# Altium PCB EMS_TC_PCB_V2.PcbDoc (part 1 of 2)
Units mil, origin at the board's own origin, x right, y up, seen from the top; angles counter-clockwise.
Board outline 4000 x 10000 mil, 4 copper layers (Top Layer, GND_1, Signal_2, GND_2), stack 53.912 mil thick; 64 components, 62 nets, 322 pads, 104 vias.
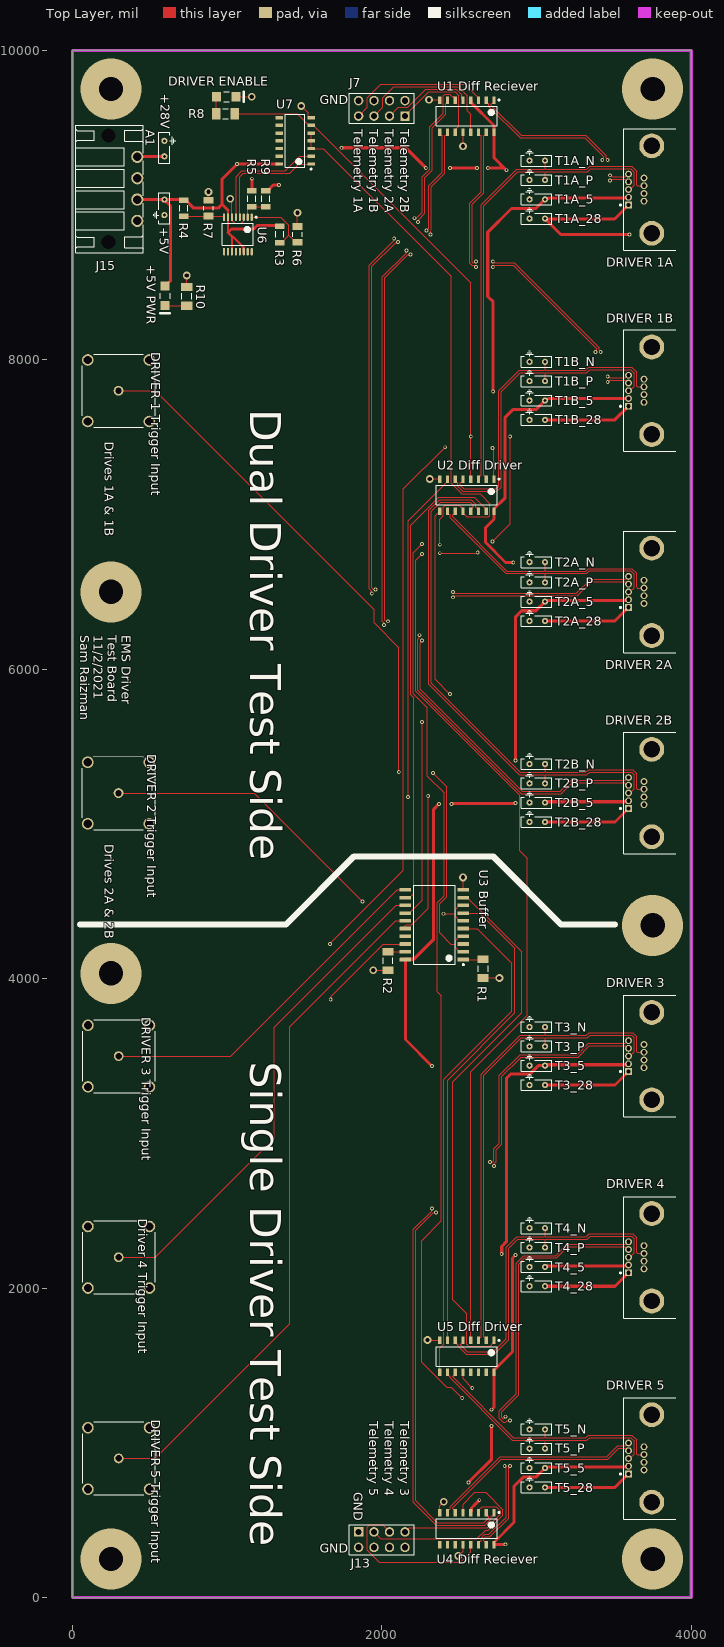
[diagram p0: Top Layer view]
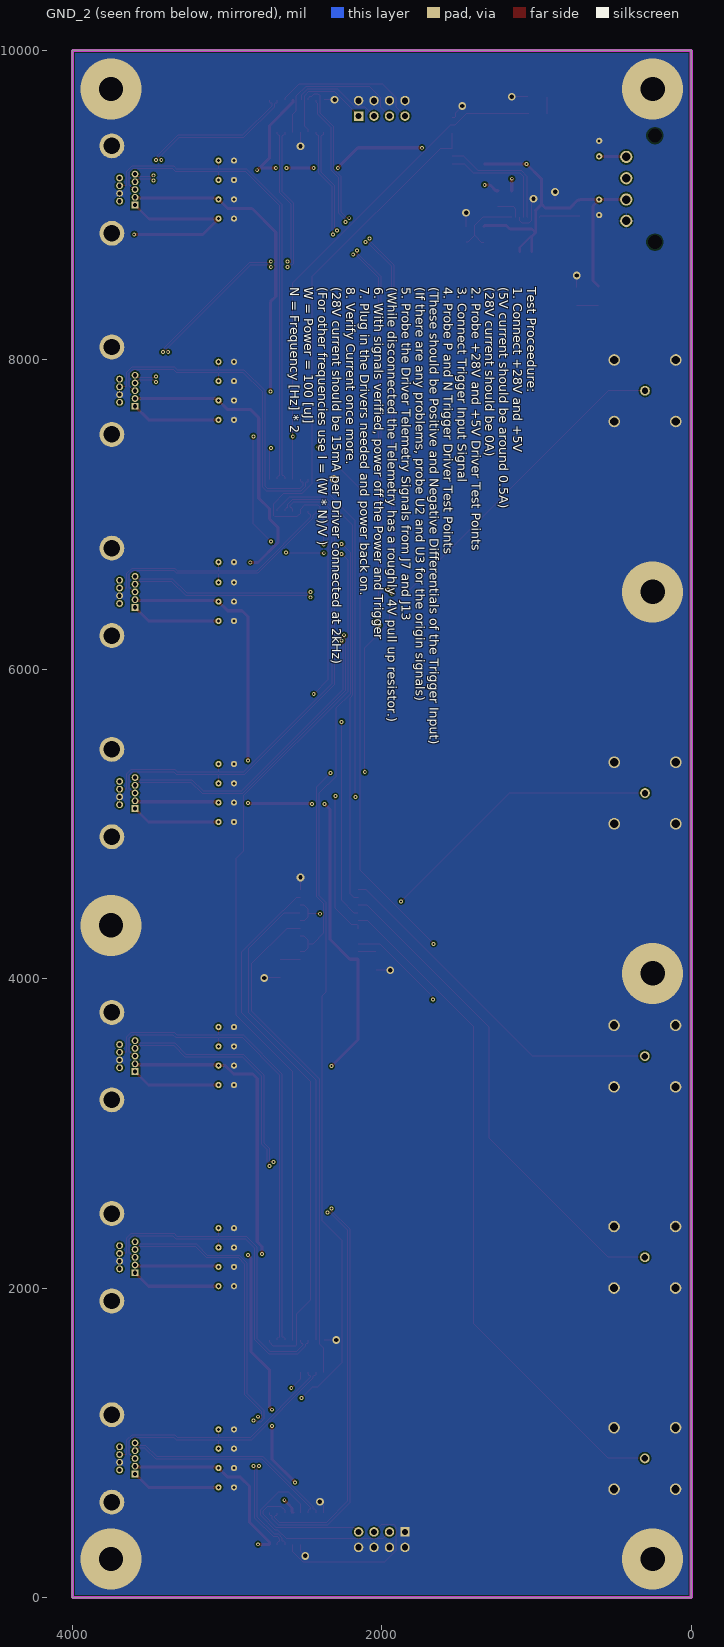
[diagram p1: GND_2 view, seen from below]
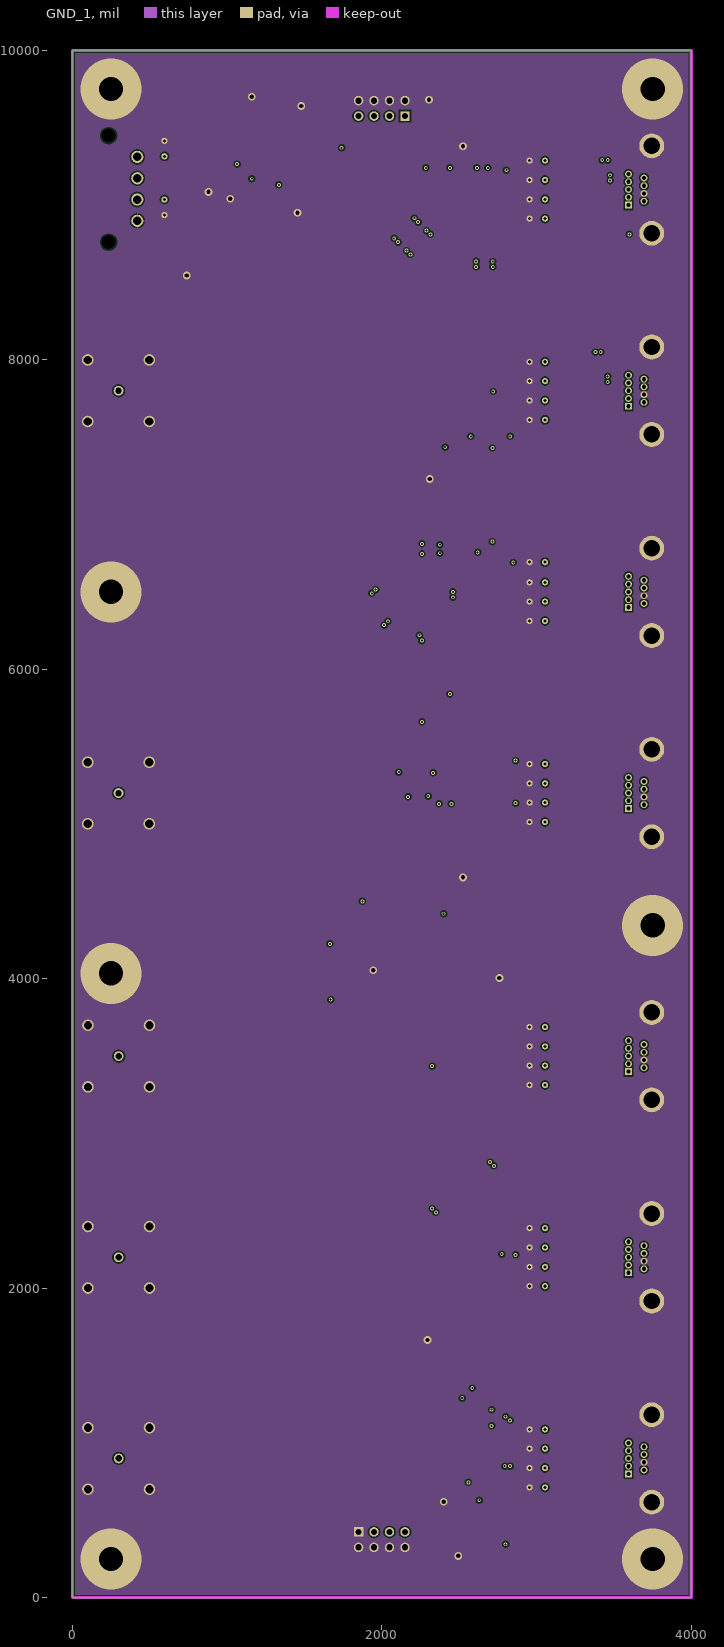
[diagram p2: GND_1]
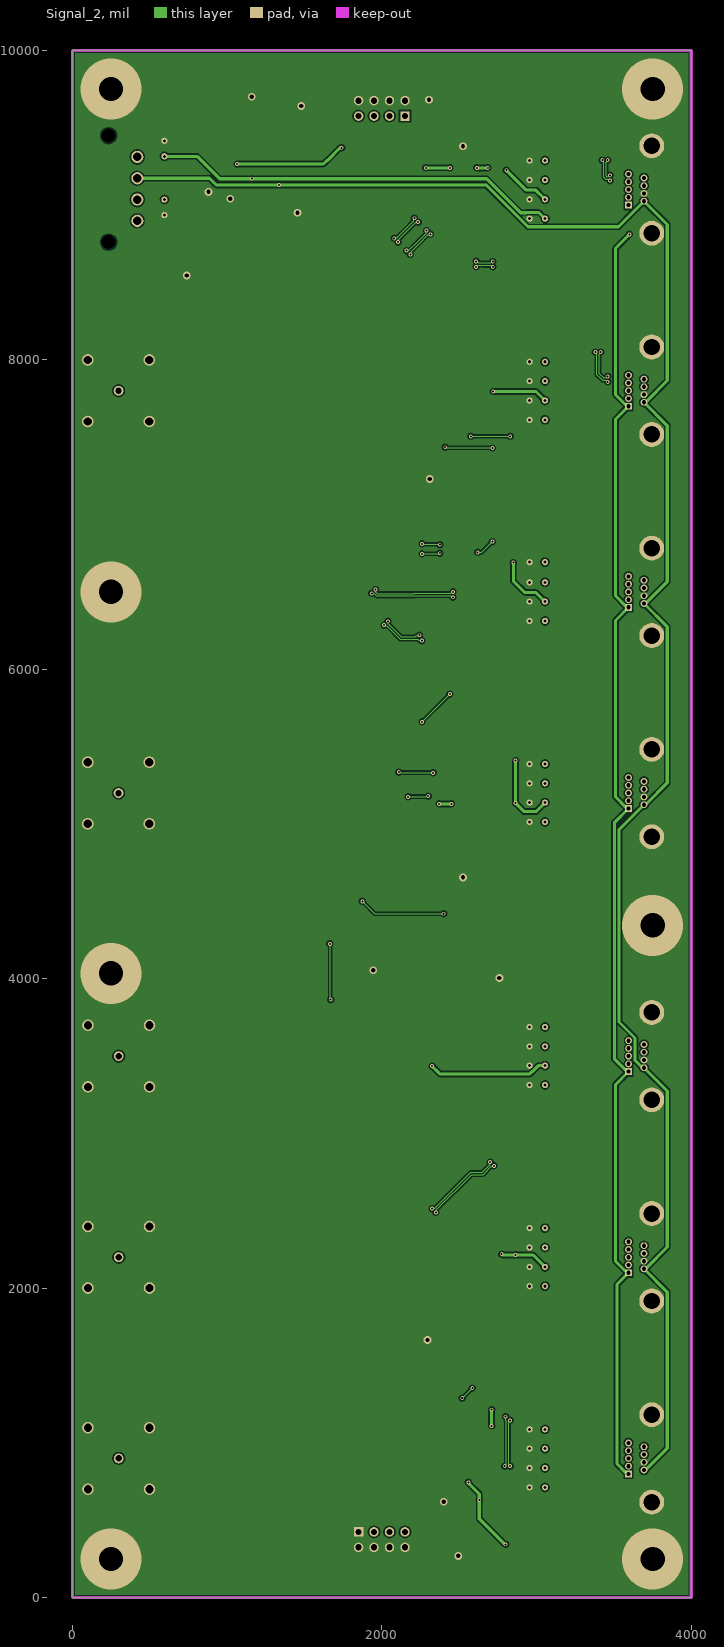
[diagram p3: Signal_2]

## Layer stack, top to bottom
Top Solder: solder mask 1, SM-001, Dk 4
Top Layer: signal copper 1.378
Dielectric 1: prepreg 5.1, PP-017, Dk 4.3
Dielectric 2: prepreg 5.1, PP-017, Dk 4.3
GND_1: signal copper 1.378
Dielectric 3: core 28, Core-039, Dk 4.8
Signal_2: signal copper 1.378
Dielectric 4: prepreg 5.1, PP-017, Dk 4.3
Dielectric 5: prepreg 5.1, PP-017, Dk 4.3
GND_2: signal copper 1.378
Bottom Solder: solder mask 1, SM-001, Dk 4

## Board outline
0,0 4000,0 4000,10000 0,10000

## Design rules (kind name [scope] priority, off if disabled: settings)
Clearance [All] p1: gap=10 ignorepadtopadclearanceinfootprint=FALSE except(0: Arc-Hole Track-Hole SMDPad-Hole THPad-Hole Via-Hole Fill-Hole Poly-Hole Region-Hole Text-Hole)
DiffPairsRouting "Schematic Differential Pairs Routing_6" [InNet('TRIG_5_P')] p1: maxlimit=10 minlimit=10 mostfreqgap=10 toplayer_minwidth=6 toplayer_maxwidth=15 toplayer_prefwidth=6 midlayer1_minwidth=6 midlayer1_maxwidth=15 midlayer1_prefwidth=6 midlayer2_minwidth=6 midlayer2_maxwidth=15 midlayer2_prefwidth=6 bottomlayer_minwidth=6 bottomlayer_maxwidth=15 bottomlayer_prefwidth=6 maxuncoupledlength=500
DiffPairsRouting "Schematic Differential Pairs Routing_5" [InNet('TRIG_1_B_P')] p2: maxlimit=10 minlimit=10 mostfreqgap=10 toplayer_minwidth=6 toplayer_maxwidth=15 toplayer_prefwidth=6 midlayer1_minwidth=6 midlayer1_maxwidth=15 midlayer1_prefwidth=6 midlayer2_minwidth=6 midlayer2_maxwidth=15 midlayer2_prefwidth=6 bottomlayer_minwidth=6 bottomlayer_maxwidth=15 bottomlayer_prefwidth=6 maxuncoupledlength=500
DiffPairsRouting "Schematic Differential Pairs Routing_4" [InNet('TRIG_4_P')] p3: maxlimit=10 minlimit=10 mostfreqgap=10 toplayer_minwidth=6 toplayer_maxwidth=15 toplayer_prefwidth=6 midlayer1_minwidth=6 midlayer1_maxwidth=15 midlayer1_prefwidth=6 midlayer2_minwidth=6 midlayer2_maxwidth=15 midlayer2_prefwidth=6 bottomlayer_minwidth=6 bottomlayer_maxwidth=15 bottomlayer_prefwidth=6 maxuncoupledlength=500
DiffPairsRouting "Schematic Differential Pairs Routing_3" [InNet('TELE_3_P')] p4: maxlimit=10 minlimit=6 mostfreqgap=10 toplayer_mingap=10 toplayer_minwidth=6 toplayer_maxwidth=15 toplayer_prefwidth=6 midlayer1_minwidth=6 midlayer1_maxwidth=15 midlayer1_prefwidth=6 midlayer2_minwidth=6 midlayer2_maxwidth=15 midlayer2_prefwidth=6 bottomlayer_mingap=10 bottomlayer_minwidth=6 bottomlayer_maxwidth=15 bottomlayer_prefwidth=6 maxuncoupledlength=500
DiffPairsRouting "Schematic Differential Pairs Routing_2" [InNet('TRIG_1_A_N')] p5: maxlimit=10 minlimit=10 mostfreqgap=10 toplayer_minwidth=6 toplayer_maxwidth=15 toplayer_prefwidth=6 midlayer1_minwidth=6 midlayer1_maxwidth=15 midlayer1_prefwidth=6 midlayer2_minwidth=6 midlayer2_maxwidth=15 midlayer2_prefwidth=6 bottomlayer_minwidth=6 bottomlayer_maxwidth=15 bottomlayer_prefwidth=6 maxuncoupledlength=500
DiffPairsRouting "Schematic Differential Pairs Routing_1" [InNet('TRIG_3_P')] p6: maxlimit=10 minlimit=10 mostfreqgap=10 toplayer_minwidth=6 toplayer_maxwidth=15 toplayer_prefwidth=6 midlayer1_minwidth=6 midlayer1_maxwidth=15 midlayer1_prefwidth=6 midlayer2_minwidth=6 midlayer2_maxwidth=15 midlayer2_prefwidth=6 bottomlayer_minwidth=6 bottomlayer_maxwidth=15 bottomlayer_prefwidth=6 maxuncoupledlength=500
DiffPairsRouting "Schematic Differential Pairs Routing" [InNet('TRIG_2_A_P')] p7: maxlimit=10 minlimit=6 mostfreqgap=6 toplayer_minwidth=6 toplayer_maxwidth=15 toplayer_prefwidth=6 midlayer1_minwidth=6 midlayer1_maxwidth=15 midlayer1_prefwidth=6 midlayer2_minwidth=6 midlayer2_maxwidth=15 midlayer2_prefwidth=6 bottomlayer_minwidth=6 bottomlayer_maxwidth=15 bottomlayer_prefwidth=6 maxuncoupledlength=500
DiffPairsRouting [All] p8: maxlimit=10 minlimit=10 mostfreqgap=10 toplayer_minwidth=6 toplayer_maxwidth=15 toplayer_prefwidth=6 midlayer1_minwidth=6 midlayer1_maxwidth=15 midlayer1_prefwidth=6 midlayer2_minwidth=6 midlayer2_maxwidth=15 midlayer2_prefwidth=6 bottomlayer_minwidth=6 bottomlayer_maxwidth=15 bottomlayer_prefwidth=6 maxuncoupledlength=500
PlaneConnect [All] p1: planeconnectstyle=Direct reliefexpansion=20 reliefentries=4 reliefconductorwidth=10 reliefairgap=10
PolygonConnect [All] p1: connectstyle=Direct reliefconductorwidth=10 reliefentries=4 polygonreliefangle="90 Angle" airgapwidth=10
RoutingVias [All] p1: holewidth=13 width=25 viastyle="Through Hole" minholewidth=13 minwidth=25 maxholewidth=60 maxwidth=80
SolderMaskExpansion [All] p1: expansion=4 istentingtop=FALSE
UnRoutedNet [All] p1: checkbadconnections=TRUE
Width [All] p1: maxlimit=25 minlimit=6 preferedwidth=6 minimp=50.000000 maximp=50.000000 favimp=50.000000
27 further rules are at their usual default settings.

## Classes and differential pairs
differential pair class TRIG_5: TRIG_5
differential pair class TRIG_4: TRIG_4
differential pair class TRIG_3: TRIG_3
differential pair class TRIG_2_B: TRIG_2_B
differential pair class TRIG_2_A: TRIG_2_A
differential pair class TRIG_1_B: TRIG_1_B
differential pair class TRIG_1_A: TRIG_1_A
differential pair class TELE_5: TELE_5
differential pair class TELE_4: TELE_4
differential pair class TELE_3: TELE_3
differential pair class TELE_2_B: TELE_2_B
differential pair class TELE_2_A: TELE_2_A
differential pair class TELE_1_B: TELE_1_B
differential pair class TELE_1_A: TELE_1_A
component class EMS_TC_PWR: +5V "+5V PWR" +28V "DRIVER ENABLE" J15 R3 R4 R5 R6 R7 R8 R9 R10 T1A_5 T1A_28 T1A_N T1A_P T1B_5 T1B_28 T1B_N T1B_P T2A_5 T2A_28 T2A_N T2A_P T2B_5 T2B_28 T2B_N T2B_P T3_5 T3_28 T3_N T3_P T4_5 T4_28 T4_N T4_P T5_5 T5_N T5_P U6 U7
component class EMS_TC_IO: "DRIVER 1 Trigger Input" "DRIVER 1A" "DRIVER 1B" "DRIVER 2 Trigger Input" "DRIVER 2A" "DRIVER 2B" "DRIVER 3" "DRIVER 3 Trigger Input" "DRIVER 4" "Driver 4 Trigger Input" "DRIVER 5" "DRIVER 5 Trigger Input" J7 J13 R1 R2 "U1 Diff Reciever" "U2 Diff Driver" "U3 Buffer" "U4 Diff Reciever" "U5 Diff Driver"
differential pair TRIG_5: +TRIG_5_P -TRIG_5_N
differential pair TRIG_4: +TRIG_4_P -TRIG_4_N
differential pair TRIG_3: +TRIG_3_P -TRIG_3_N
differential pair TRIG_2_B: +TRIG_2_B_P -TRIG_2_B_N
differential pair TRIG_2_A: +TRIG_2_A_P -TRIG_2_A_N
differential pair TRIG_1_B: +TRIG_1_B_P -TRIG_1_B_N
differential pair TRIG_1_A: +TRIG_1_A_P -TRIG_1_A_N
differential pair TELE_5: +TELE_5_P -TELE_5_N
differential pair TELE_4: +TELE_4_P -TELE_4_N
differential pair TELE_3: +TELE_3_P -TELE_3_N
differential pair TELE_2_B: +TELE_2_B_P -TELE_2_B_N
differential pair TELE_2_A: +TELE_2_A_P -TELE_2_A_N
differential pair TELE_1_B: +TELE_1_B_P -TELE_1_B_N
differential pair TELE_1_A: +TELE_1_A_P -TELE_1_A_N

## Components (designator, comment, footprint, x,y, rotation, side; value= is the part's Value field where it differs from the comment)
+5V "+5V_IN Probe" TDR_Probe 595,9035 r270 top (schematic designator TP2)
"+5V PWR" "SML-LX1206GC-TR" LUMX-SML-LX1206GC-TR_V 600,8412.99 r270 top (schematic designator DS2)
+28V "+28V_IN Probe" TDR_Probe 595,9315 r90 top (schematic designator TP1)
"DRIVER 1 Trigger Input" "TRIG_1_IN" ROS-51K204-400A5_V 298.82,7800 r90 top (schematic designator J5)
"DRIVER 1A" "DRIVER_1A" FP-381-009-112L565-MFG 3900,9100 r90 top (schematic designator J1)
"DRIVER 1B" "DRIVER_1B" FP-381-009-112L565-MFG 3900,7800 r90 top (schematic designator J2)
"DRIVER 2 Trigger Input" "TRIG_2_IN" ROS-51K204-400A5_V 298.82,5200 r90 top (schematic designator J6)
"DRIVER 2A" "DRIVER_2A" FP-381-009-112L565-MFG 3900,6500 r90 top (schematic designator J3)
"DRIVER 2B" "DRIVER_2B" FP-381-009-112L565-MFG 3900,5200 r90 top (schematic designator J4)
"DRIVER 3" "DRIVER_3" FP-381-009-112L565-MFG 3900,3500 r90 top (schematic designator J9)
"DRIVER 3 Trigger Input" "TRIG_3_IN" ROS-51K204-400A5_V 300,3500 r90 top (schematic designator J8)
"DRIVER 4" "DRIVER_4" FP-381-009-112L565-MFG 3900,2200 r90 top (schematic designator J10)
"Driver 4 Trigger Input" "TRIG_4_IN" ROS-51K204-400A5_V 300,2200 r90 top (schematic designator J12)
"DRIVER 5" "DRIVER_5" FP-381-009-112L565-MFG 3900,900 r90 top (schematic designator J11)
"DRIVER 5 Trigger Input" "TRIG_5_IN" ROS-51K204-400A5_V 300,900 r90 top (schematic designator J14)
"DRIVER ENABLE" "SML-LX1206GC-TR" LUMX-SML-LX1206GC-TR_V 995,9700 r0 top (schematic designator DS1)
J7 "SSW-104-02-G-D" SMTC-SSW-104-02-X-D 2150,9575 r180 top
J13 "SSW-104-02-G-D" SMTC-SSW-104-02-X-D 1850,425 r0 top
J15 "1607060000" SL_3_50_90F_04 239.72,9104.49 r270 top
R1 "10k" RESC3116X65X40ML10T20 2655,4065 r270 top
R2 "10k" RESC3116X65X40ML10T20 2040,4115 r270 top
R3 "8.2k" RESC3216X70X50LL05T20 1340,8810 r90 top
R4 "8.2k" RESC3216X70X50LL05T20 720,8980 r90 top
R5 "8.2k" RESC3216X70X50LL05T20 1160,9040 r90 top
R6 "820k" RESC3216X70X50LL20T25 1455,8810 r270 top
R7 "820k" RESC3216X70X50LL20T25 880,8980 r270 top
R8 "330" FP-CRCW1206-e3-IPC_A 990,9590 r180 top
R9 "1.8k" RESC3216X70X50LL05T20 1250,9040 r270 top
R10 "330" FP-CRCW1206-e3-IPC_A 740,8410 r270 top
T1A_5 "+5V" TDR_Probe 3055,9037 r180 top (schematic designator TP24)
T1A_28 "+28V" TDR_Probe 3055,8912 r180 top (schematic designator TP17)
T1A_N "TRIG_1A_N" TDR_Probe 3055,9287 r180 top (schematic designator TP10)
T1A_P "TRIG_1A_P" TDR_Probe 3055,9162 r180 top (schematic designator TP3)
T1B_5 "+5V" TDR_Probe 3055,7737 r180 top (schematic designator TP25)
T1B_28 "+28V" TDR_Probe 3055,7612 r180 top (schematic designator TP18)
T1B_N "TRIG_1B_N" TDR_Probe 3055,7987 r180 top (schematic designator TP11)
T1B_P "TRIG_1B_P" TDR_Probe 3055,7862 r180 top (schematic designator TP4)
T2A_5 "+5V" TDR_Probe 3055,6437 r180 top (schematic designator TP26)
T2A_28 "+28V" TDR_Probe 3055,6312 r180 top (schematic designator TP19)
T2A_N "TRIG_2A_N" TDR_Probe 3055,6692 r180 top (schematic designator TP12)
T2A_P "TRIG_2A_P" TDR_Probe 3055,6562 r180 top (schematic designator TP5)
T2B_5 "+5V" TDR_Probe 3055,5138 r180 top (schematic designator TP27)
T2B_28 "+28V" TDR_Probe 3055,5013 r180 top (schematic designator TP20)
T2B_N "TRIG_2B_N" TDR_Probe 3055,5388 r180 top (schematic designator TP13)
T2B_P "TRIG_2B_P" TDR_Probe 3055,5263 r180 top (schematic designator TP6)
T3_5 "+5V" TDR_Probe 3055,3438 r180 top (schematic designator TP28)
T3_28 "+28V" TDR_Probe 3055,3313 r180 top (schematic designator TP21)
T3_N "TRIG_3_N" TDR_Probe 3055,3688 r180 top (schematic designator TP14)
T3_P "TRIG_3_P" TDR_Probe 3055,3563 r180 top (schematic designator TP7)
T4_5 "+5V" TDR_Probe 3055,2138 r180 top (schematic designator TP29)
T4_28 "+28V" TDR_Probe 3055,2013 r180 top (schematic designator TP22)
T4_N "TRIG_4_N" TDR_Probe 3055,2388 r180 top (schematic designator TP15)
T4_P "TRIG_4_P" TDR_Probe 3055,2263 r180 top (schematic designator TP8)
T5_5 "+5V" TDR_Probe 3055,838 r180 top (schematic designator TP30)
T5_28 "+28V" TDR_Probe 3055,713 r180 top (schematic designator TP23)
T5_N "TRIG_5_N" TDR_Probe 3055,1088 r180 top (schematic designator TP16)
T5_P "TRIG_5_P" TDR_Probe 3055,963 r180 top (schematic designator TP9)
"U1 Diff Reciever" "DS26C32ATM" D0016A_L 2550,9575 r270 top (schematic designator U1)
"U2 Diff Driver" "DS26C31TM" D0016A_L 2550,7125 r270 top (schematic designator U2)
"U3 Buffer" "SN74ABT240ADW" DW0020A_N 2340,4349.23 r180 top (schematic designator U3)
"U4 Diff Reciever" "DS26C32ATM" D0016A_L 2550,446.65 r270 top (schematic designator U4)
"U5 Diff Driver" "DS26C31TM" D0016A_L 2550,1560 r270 top (schematic designator U5)
U6 "AD8564" ADI-RU-16_L 1070,8810 r270 top
U7 "SN74AHCT132D" D0014A_L 1440,9415 r180 top

## Footprints (in the part's own frame and the unit in brackets; to place one, negate y for a bottom-side part, rotate by r counter-clockwise, add the part's x,y. Pads: shape width x height; smd on the part's side, far side on the other; paste and mask are expansions set on the pad)
ADI-RU-16_L [mm] "SOP, 16-Leads, Body 5x4.4mm, Pitch 0.65mm, IPC High Density"
  oval 1.25x0.35 smd: 1(-2.825,2.275) 2(-2.825,1.625) 3(-2.825,0.975) 4(-2.825,0.325) 5(-2.825,-0.325) 6(-2.825,-0.975) 7(-2.825,-1.625) 8(-2.825,-2.275) 9(2.825,-2.275) 10(2.825,-1.625) 11(2.825,-0.975) 12(2.825,-0.325) 13(2.825,0.325) 14(2.825,0.975) 15(2.825,1.625) 16(2.825,2.275)
  silkscreen extent -2.95,-2.55 1.8,3.13, body extent -2.25,-2.55 2.25,2.55, height 1.2
D0014A_L [mm] "SOIC, 14-Leads, Body 8.75x4mm, Pitch 1.27mm, IPC High Density"
  rrect18% 1.25x0.55 smd: 1(-2.625,3.81) 2(-2.625,2.54) 3(-2.625,1.27) 4(-2.625,0) 5(-2.625,-1.27) 6(-2.625,-2.54) 7(-2.625,-3.81) 8(2.625,-3.81) 9(2.625,-2.54) 10(2.625,-1.27) 11(2.625,0) 12(2.625,1.27) 13(2.625,2.54) 14(2.625,3.81)
  silkscreen extent -2.75,-4.38 1.6,4.76, body extent -3.02,-4.32 3.02,4.32, height 1.59
D0016A_L [mm] "SOIC, 16-Leads, Body 10x4mm, Pitch 1.27mm, IPC High Density"
  rrect18% 1.25x0.55 smd: 1(-2.625,4.445) 2(-2.625,3.175) 3(-2.625,1.905) 4(-2.625,0.635) 5(-2.625,-0.635) 6(-2.625,-1.905) 7(-2.625,-3.175) 8(-2.625,-4.445) 9(2.625,-4.445) 10(2.625,-3.175) 11(2.625,-1.905) 12(2.625,-0.635) 13(2.625,0.635) 14(2.625,1.905) 15(2.625,3.175) 16(2.625,4.445)
  silkscreen extent -2.75,-5 1.6,5.4, body extent -3,-4.95 3,4.95, height 1.59
DW0020A_N [mm] "SOIC, 20-Leads, Body 13x7.6mm, Pitch 1.27mm, IPC Medium Density"
  rrect17% 1.9x0.6 smd: 1(-4.75,5.715) 2(-4.75,4.445) 3(-4.75,3.175) 4(-4.75,1.905) 5(-4.75,0.635) 6(-4.75,-0.635) 7(-4.75,-1.905) 8(-4.75,-3.175) 9(-4.75,-4.445) 10(-4.75,-5.715) 11(4.75,-5.715) 12(4.75,-4.445) 13(4.75,-3.175) 14(4.75,-1.905) 15(4.75,-0.635) 16(4.75,0.635) 17(4.75,1.905) 18(4.75,3.175) 19(4.75,4.445) 20(4.75,5.715)
  silkscreen extent -4.88,-6.5 3.4,6.69, body extent -5.16,-6.4 5.16,6.4, height 2.52
FP-381-009-112L565-MFG [mm]
  rect 1.12x1.12 hole 0.7 paste-1000 mask+0: 1(-2.54,7.76)
  round 1.12 hole 0.7 paste-1000 mask+0: 2(-1.27,7.76) 3(0,7.76) 4(1.27,7.76) 5(2.54,7.76) 6(-1.905,5.22) 7(-0.635,5.22) 8(0.635,5.22) 9(1.905,5.22)
  round 4.09 hole 2.69 paste-1000 mask+0: 10(-7.175,3.95) 11(7.175,3.95)
  silkscreen extent -9.97,0 9.97,9.2, body extent -10.07,-8.65 10.07,8.65, height 0.25
FP-CRCW1206-e3-IPC_A [mil]
  rect 53.39x73.16 smd paste+0 mask+0: 1(-60.08,0) 2(60.08,0)
  silkscreen extent -19,-31 19,31, body extent -106,-56 106,56, height 10
LUMX-SML-LX1206GC-TR_V [mm] "SMD, 2-Leads, Body 3.2x1.6mm"
  rect 1.5x1.5 smd: 1(-1.6,0) 2(1.6,0)
  silkscreen extent -0.45,-0.8 2.85,0.8, body extent -1.6,-0.8 1.6,0.8, height 1.1
RESC3116X65X40ML10T20 [mm] "Chip Resistor, 2-Leads, Body 3.10x1.60mm, IPC Low Density"
  rect 1.25x1.8 smd: 1(-1.525,0) 2(1.525,0)
  silkscreen extent -0.5,-0.8 0.5,0.8, body extent -1.6,-0.85 1.6,0.85, height 0.65
RESC3216X70X50LL05T20 [mm] "Chip Resistor, 2-Leads, Body 3.20x1.60mm, IPC High Density"
  rect 0.9x1.55 smd: 1(-1.325,0) 2(1.325,0)
  silkscreen extent -0.5,-0.67 0.5,0.67, body extent -1.63,-0.82 1.62,0.82, height 0.7
RESC3216X70X50LL20T25 [mm] "Chip Resistor, 2-Leads, Body 3.20x1.60mm, IPC High Density"
  rect 1.1x1.7 smd: 1(-1.3,0) 2(1.3,0)
  silkscreen extent -0.35,-0.75 0.35,0.75, body extent -1.7,-0.9 1.7,0.9, height 0.7
ROS-51K204-400A5_V [mm] "BNC 50R Right Angle Jack, 12.5x32.6x14.5mm, Rosenberger Recommended"
  round 1.6 hole 1.05: 1(0,0)
  round 1.9 hole 1.35: MH(-5.05,-5.05) MH(-5.05,5.05) MH(5.05,-5.05) MH(5.05,5.05)
  silkscreen extent -6,-6 6,6, body extent -6.25,-6 6.25,26.6, height 15.25
SL_3_50_90F_04 [mm] "OMNIMATE Signal - Serie BL/SL 3.50  SL 3.50/04/90F 3.2"
  round 0 hole 2.3 unplated: 0(-8.75,-0.12) 0(8.75,-0.12)
  round 2 hole 1.4: A1(-5.25,4.58) A2(-1.75,4.58) A3(1.75,4.58) A4(5.25,4.58)
  silkscreen extent -10.45,-5.53 10.45,5.53, body extent -10.45,-5.52 10.45,5.53, height 7.46
SMTC-SSW-104-02-X-D [mm] "SQ Post Socket, 2x4 Pins, Vertical, 2.54mm Pitch, Female"
  rect 1.55x1.55 hole 1.04: 1(0,0)
  round 1.55 hole 1.04: 2(0,-2.54) 3(2.54,0) 4(2.54,-2.54) 5(5.08,0) 6(5.08,-2.54) 7(7.62,0) 8(7.62,-2.54)
  silkscreen extent -1.53,-3.74 9.15,1.2, body extent -1.52,-3.75 9.14,1.21, height 8.51
TDR_Probe [mil]
  round 40 hole 20: 1(0,0) 2(100,0)
  silkscreen extent -45,-70 155,35

## Part data
+5V +28V T1A_5 T1A_28 T1A_N T1A_P T1B_5 T1B_28 T1B_N T1B_P T2A_5 T2A_28 T2A_N T2A_P T2B_5 T2B_28 T2B_N T2B_P T3_5 T3_28 T3_N T3_P T4_5 T4_28 T4_N T4_P T5_5 T5_28 T5_N T5_P: library part TP_TDR, "Small Pad Holes for the TDR Probes"
"+5V PWR" "DRIVER ENABLE": library part CMP-2000-07122-1, "Green Led, Water Clear Lens, 10 mcd, 565 nm, 2.2 V, -40 to 85 degC, 2-Pin SMD, RoHS, Tape and Reel", Color=Green, Manufacturer=Lumex, Operating Temperature=-40to85C, Package Description="2-Pin Surface Mount Device, Body 3.2 x 1.6 mm", Reverse Voltage=5(Min)V, Supplier_Package=SMD, COO=CN, Datasheet URL=http://www.mouser.com/ds/2/244/SML-LX1206GC-TR-112732.pdf, Datasheet Version="Rev. J, 04/2011", Dimension=3.2x1.6x1.1mm, Dominant Wavelength=N/A, ECCN=EAR99, Family=SML-LX1206GC, HTS=8541402000, Intensity=10mcd, LED Material=GaP, Lens Appearance=ColorlessNonDiffused, Lens Dimensions=2x1.6x0.5mm, Manufacturer URL=http://www.lumexinstruments.com/, Mounting=SurfaceMount, Mounting Technology=SurfaceMount, Number of LEDs=1, Package Reference=SML-LX1206GC-TR, Packaging=TapeandReel, Part No=SML-LX1206GC-TR, Peak Wavelength=565nm, Pin_Count=2, RoHS=Yes, Supplier=Lumex, Supplier Standard Pack=3,000, Type=Uni-Color, Viewing Angle=160
"DRIVER 1 Trigger Input" "DRIVER 2 Trigger Input" "DRIVER 3 Trigger Input" "Driver 4 Trigger Input" "DRIVER 5 Trigger Input": library part CMP-0753-00004-1, "BNC 50R Right Angle Jack, Panel Feedthrough, Up to 10 GHz, -55 to 155 degC", Manufacturer=Rosenberger, PartNumber=51K204-400A5, ComponentLink1Description="Manufacturer URL", ComponentLink1URL=http://www.rosenberger.de, ComponentLink2Description=Datasheet, ComponentLink2URL=http://rosenberger.de/ok/images/documents/db/51K204-400A5.pdf, ComponentLink3Description="Package Specification", ComponentLink3URL=http://rosenberger.de/ok/images/documents/db/51K204-400A5.pdf, ComponentLink4Description="Series Overview / Design Note", ComponentLink4URL=http://rosenberger.de/ok/images/documents/spez/51.pdf, ComponentLink5Description="Webshop / RFQ", ComponentLink5URL=http://www.rosenberger.com/en/contact/sales/, DatasheetVersion=d00, Design Note="Footprint in library is a generic example - only application specific footprint delivers High Performance", Mounting Technology="Through Hole", PackageDescription="50R BNC Right Angle Jack, 12.5 x 32.6 x 14.5 mm", PackageReference=51K204-400A5, PackageVersion=d00
"DRIVER 1A" "DRIVER 1B" "DRIVER 2A" "DRIVER 2B" "DRIVER 3" "DRIVER 4" "DRIVER 5": library part CMP-42562-000005-1, "CONN MICRO-D PLUG 9POS R/A SLDR", Current Rating=1A, Manufacturer="NorComp Inc.", Manufacturer Part Number=381-009-112L565, Temperature="-55°C to +85°C", Temperature Range High=+85°C, Temperature Range Low=-55°C, Voltage Rating=500V, Automotive=No, Category=Conn, ComponentLink2Description=Datasheet, ComponentLink2URL=https://www.norcomp.net/rohspdfs/Micro-D/381-009-112L565.pdf, Conn Gender=Male, Conn Orientation="Right Angle", Contact Material=Gold,Nickel, Device Class L1=Connectors, Device Class L2="D-Sub Connectors", Device Class L3=unset, Digikey Description="CONN MICRO-D PLUG 9POS R/A SLDR", Height=8.003mm, Lead Free=Yes, Mouser Description="D-Sub Micro-D Connectors MICRO-D 9P R/A W/ STNDOFF/BRDLK", Number Of Contacts=9, Octopart=https://octopart.com/381-009-112l565-norcomp-21388372, Package=381-009-112L565, Pitch=1.27mm, RoHS=TRUE, Shielding=true
J7 J13: library part CMP-1023-00343-1, "SQ Post Socket, Through-hole, Vertical, -55 to 125 degC, 2.54mm Pitch, 8-Pin, Female, RoHS", Manufacturer=Samtec, Temperature Range="-55 to 125 degC", ComponentLink1Description="Manufacturer URL", ComponentLink1URL=http://www.samtec.com, ComponentLink2Description=Datasheet, ComponentLink2URL=http://www.samtec.com/documents/webfiles/pdf/SSW_TH.PDF, ComponentLink3Description="Package Specification", ComponentLink3URL=http://www.samtec.com/documents/webfiles/cpdf/SSW-1XX-XX-XXX-X-XX-XXX-XX-MKT.pdf, DatasheetVersion=F-214, Mounting Technology=Through-hole, Orientation=Vertical, PackageDescription="Assembly, Socket Strip .016 X .031 Tail", PackageReference=SSW-104-02-X-D, PackageVersion="CA, 6/1987", PartNumber=SSW-104-02-G-D, Pitch="2.54 mm", RoHS=True
J15: library part CMP-1559-00921-1, "OMNIMATE Signal - series BL/SL 3.50", Colour=Orange, Manufacturer=Weidmueller, Rated_current_min_no_of_poles_TU_20_deg_C="32 A", Rated_current_use_group_B_UL_1059="10 A", Rated_voltage_for_surge_voltage_class_pollution_degree_II_2="320 V", Rated_voltage_use_group_B_UL_1059="300 V", UL_94_flammability_rating=V-0, ComponentLink1Description="Manufacturer URL", ComponentLink1URL=http://www.weidmueller.com/, ComponentLink2Description="URL Link1", ComponentLink2URL=http://catalog.weidmueller.com/catalog/Start.do?localeId=en&ObjectID=1607060000, Contact_material=CuSn, Contact_surface=tinned, Insulating_material=PBT, Mounting_onto_the_PCB="Solder connection", No_of_poles=4, Outgoing_elbow=90°, PackageReference=SL_3_50_90F_04, Packaging=Box, PartNumber=1607060000, Pitch_inch="0.138 inch", Pitch_mm="3.5 mm", Qty="100 PCS", Revision=V1, Short_text_for_material="SL 3.50/04/90F 3.2SN OR BX", Side_termination_characteristic=Flange, Solder_pin_length_mm="3.2 mm"
R1 R2: library part CMP-1014-00623-2, "Chip Resistor, 10 KOhm, +/- 1%, 0.25 W, -55 to 155 degC, 1206 (3216 Metric), RoHS, Tape and Reel", Case Code (Imperial)=1206, Case Code (Metric)=3216, Manufacturer=Yageo, Max Operating Temperature=155degC, Min Operating Temperature=-55degC, Package Description="2-Pin Surface Mount Device, Body 3.1 x 1.6 mm", Package Quantity=5000, Package Reference=1206.0, Power Rating=250mW, Resistance=10KOhm, Temperature Coefficient=100ppm/degreesC, Tolerance=1%, Voltage Rating=200V, Case/Package=1206, Composition=ThickFilm, Datasheet URL=http://www.yageo.com/NewPortal/yageodocoutput?fileName=/pdf/R-Chip/PYu-RC_Group_51_RoHS_L_5.pdf, Datasheet Version="Rev. 5, 10/2016", Depth=1.6mm, Height=0.55mm, Lead Free=LeadFree, Length=3.1mm, Manufacturer URL=http://www.yageo.com/, Military Standard=Not, Packaging=TapeandReel, REACH SVHC=Unknown, RoHSCompliant=true, Termination=SMD/SMT, Width=1.6mm
R3 R4 R5: library part CMP-2003-00870-1, Manufacturer=Panasonic, Part Number=ERJ8ENF8201V
R6 R7: library part CMP-2003-00010-1, Manufacturer=Panasonic, Part Number=ERA8AEB824V
R8 R10: library part CMP-2003-02098-2, "RES Thick Film, 330Ω, 1%, 0.25W, 100ppm/°C, 1206", Case Code (Imperial)=1206, Case Code (Metric)=3216, Max Operating Temperature=155°C, Max Power Dissipation=250mW, Min Operating Temperature=-55°C, Package Quantity=10, Resistance=330R, Temperature Coefficient=100ppm/°C, Tolerance=1%, Voltage Rating=200V, Case/Package=1206, Composition="Thick Film", Contact Plating=Tin, Depth=1.6mm, Features="Automotive AEC-Q200", Height=0.55mm, Lead Free="Lead Free", Length=3.2mm, Military Standard=Not, Mount="Surface Mount", Number of Terminations=2, Packaging="Tape and Reel", Power Rating=250mW, Radiation Hardening=No, Termination=SMD/SMT, Voltage Rating (DC)=200V, Weight=0.000353oz, Width=1.6mm
R9: library part CMP-2003-00168-1, Manufacturer=Panasonic, Part Number=ERJ8ENF1801V
"U1 Diff Reciever" "U4 Diff Reciever": library part CMP-0058-00986-3, "CMOS Quad Differential Line Receiver, 16-pin Narrow SOIC", Manufacturer="Texas Instruments", PackageTopMarking=NSUZXYTTE#*DS26C32ATM, PowerWise=N, Code_IPC=SOIC127P600-16, Code_JEDEC=MS-012-AC, ComponentLink1Description="Datasheet URL", ComponentLink1URL=http://www.ti.com/general/docs/lit/getliterature.tsp?genericPartNumber=DS26C32AT&fileType=pdf, CompType="Interface IC", PackageDescription="Molded Package, SO, .150in Wide, 16 Lead", PackageReference=D0016A, PinCount=16, RoHS=N
"U2 Diff Driver" "U5 Diff Driver": library part CMP-0058-00990-3, "CMOS Quad Tri-State Differential Line Driver, 16-pin Narrow SOIC", Manufacturer="Texas Instruments", PackageTopMarking=NSUZXYTTE#*DS26C31TM, PowerWise=N, Code_IPC=SOIC127P600-16, Code_JEDEC=MS-012-AC, ComponentLink1Description="Datasheet URL", ComponentLink1URL=http://www.ti.com/general/docs/lit/getliterature.tsp?genericPartNumber=DS26C31T&fileType=pdf, CompType="Interface IC", PackageDescription="Molded Package, SO, .150in Wide, 16 Lead", PackageReference=D0016A, PinCount=16, RoHS=N
"U3 Buffer": library part CMP-1615-00030-3, "Octal Buffers/Drivers With 3-State Outputs, DW0020A, TUBE", F @ Nom Voltage(Max)(Mhz)=150, Generic Part Number=SN74ABT240A, ICC @ Nom Voltage(Max)(mA)=0.0055, Manufacturer="Texas Instruments", Operating Temperature Range(C)="-40 to 85", Rating=Catalog, tpd @ Nom Voltage(Max)(ns)=4.8, Voltage(Nom)(V)=5, Bits(#)=8, Code_JEDEC=MS-013, DatasheetVersion=SCBS098I, Input Type=TTL, Output Drive (IOL/IOH)(Max)(mA)=-32/64, Output Type=TTL, PackageReference=DW0020A, Schmitt Trigger=No, Technology Family=ABT, VCC(Max)(V)=5.5, VCC(Min)(V)=4.5
U6: library part CMP-0783-00155-1, "Quad Single Supply Comparator, 5 V, 7 ns Delay, Industrial, 16-pin SOP (RU-16), Reel", Manufacturer="Analog Devices", PartNumber=AD8564ARUZ-REEL, Total Power (mW)=150mW, Voltage Supply (V)="+/- 5", Code_JEDEC=MO-153AB, ComponentLink1Description="Manufacturer URL", ComponentLink1URL=http://www.analog.com/en/index.html, ComponentLink2Description=Datasheet, ComponentLink2URL=http://www.analog.com/static/imported-files/data_sheets/AD8564.pdf, ComponentLink3Description="Package Specification", ComponentLink3URL=http:/www.analog.com/static/imported-files/packages/36244347913743854010197452789RU16.pdf, ComponentLink4Description="URL Link1", ComponentLink4URL="Product URL:http://www.analog.com/en/special-linear-functions/comparators/ad8564/products/product.html", DatasheetVersion="Rev. B", Input Range (V)="-4.9 to 3.5", Mounting Technology="Surface Mount", PackageDescription="16-Pin Thin Shrink Small Outline Package, Body 5 x 4.4 mm, Pitch 0.65 mm", PackageReference=RU-16, PackageVersion=Nov-02, Packing=Reel
U7: library part CMP-1627-00035-3, "Quadruple Positive-NAND Gates With Schmitt-Trigger Inputs, D0014A, TUBE", F @ Nom Voltage(Max)(Mhz)=70, Generic Part Number=SN74AHCT132, ICC @ Nom Voltage(Max)(mA)=0.02, Manufacturer="Texas Instruments", Operating Temperature Range(C)="-40 to 85", Rating=Catalog, tpd @ Nom Voltage(Max)(ns)=10, Voltage(Nom)(V)=5, Bits(#)=4, Code_JEDEC=MS-012, DatasheetVersion=SCLS366G, Input Type=TTL, Output Drive (IOL/IOH)(Max)(mA)=8/-8, Output Type=CMOS, PackageReference=D0014A, Schmitt Trigger=Yes, Technology Family=AHCT, VCC(Max)(V)=5.5, VCC(Min)(V)=4.5

## Via types
v1: diameter 25, hole 13, Top Layer to GND_2, 82 vias
v2: diameter 50, hole 28, Top Layer to GND_2, 15 vias
v3: diameter 393.7, hole 157.48, Top Layer to GND_2, 7 vias

## Nets (pads, with @x,y where several pads share a name; then routed paths per layer and width w, separated by ;. In a path a pad name is that pad's centre, name@x,y a point inside that pad or via, vN(x,y) a via of type N, cw(c..) or ccw(c..) an arc to the next point about the centre after c; other vN are vias at no path point)
+5V_IN: "+5V PWR.1" "DRIVER 1A.2" "DRIVER 1B.2" "DRIVER 2A.2" "DRIVER 2B.2" "DRIVER 3.2" "DRIVER 4.2" "DRIVER 5.2" "U1 Diff Reciever.4" "U1 Diff Reciever.16" "U2 Diff Driver.16" "U3 Buffer.20" "U4 Diff Reciever.4" "U4 Diff Reciever.16" "U5 Diff Driver.16" +5V.1 J15.A3 R3.2 R4.2 T1A_5.1 T1B_5.1 T2A_5.1 T2B_5.1 T3_5.1 T4_5.1 T5_5.1 U6.7 U6.11 U6.14 U7.14 | length 22286.2
  Top Layer w15: 1006.02,8822.05 U6.7@1006.02,8921.22 1006.02,8966.27 ; U6.11@1031.61,8698.78 1031.61,8796.46 1037.32,8796.46 1107.78,8726.01 U6.14@1107.78,8719.21 ; U6.14@1107.78,8719.21 1108.39,8718.6 U6.14@1108.39,8698.78 1107.78,8699.39 U6.14@1107.78,8719.21
  Top Layer w20: J15.A3@420.04,9035.59 420.33,9035.3 594.7,9035.3 +5V.1@595,9035 ; 600,8475.98 635,8510.98 635,8995 +5V.1@595,9035 ; 1006.02,8966.27 967.29,9005 ; 1031.61,8796.46 1006.02,8822.05 1028.81,8844.83 1172.22,8844.83 1195,8867.61 1334.55,8867.61 R3.2@1340,8862.17 ; U7.14@1336.65,9265 v1(1065,9265) 967.29,9167.29 967.29,9005 ; v1(1740,9370) 2155,9370 v1(2284.47,9240.53) ; v1(2325,3435) 2152.99,3607.01 2152.99,4124.23 2154.8,4126.04 2206.04,4126.04 2335,4255 2335,5095 v1(2370,5130) ; v1(2440,9240) v1(2615,9240) ; v1(2450,5130) 2452.5,5132.5 2862.5,5132.5 v1(2865,5135) ; v1(2560,745) 2710,895 v1(2710,1110) ; 2575,550 2580.01,555.01 2580.01,580.01 2603.31,603.31 v1(2630,630) ; 2575,9678.35 2575,9664.57 2725,9514.57 2725,9305 v1(2805,9225) 2804.59,9225 2789.59,9240 v1(2685,9240) ; v1(2710,1215) 2710,1215.41 2725,1230.41 2725,1456.65 2725,1470.43 2845,1590.43 2845,2195 v1(2865,2215) ; v1(2720,7795) 2720,8374 2685,8409 2685,8825 2838.08,8978.08 2996.08,8978.08 T1A_5.1@3055,9037 3061.51,9043.51 3078.51,9043.51 3080,9045 3589.49,9045 3594.49,9050 ; v1(2775,2220) 2775,2270 2805,2300 2805,3355 2835,3385 2958.57,3385 3011.57,3438 T3_5.1@3055,3438 3061,3444 3588.49,3444 3594.49,3450 ; v1(2800,345) 2726.69,345 2725,343.31 2725,357.09 2853.62,485.71 2853.62,718.62 2914.08,779.08 2996.08,779.08 T5_5.1@3055,838 3061,844 3588.49,844 3594.49,850 ; v1(2850,6690) 2800,6690 2670,6820 2670,6915 2725,6970 2725,7021.65 2725,7035.43 2795,7105.43 2795,7625 2850,7680 2998,7680 T1B_5.1@3055,7737 3064.2,7737 3077.2,7750 3594.49,7750 ; v1(2865,5410) 2865,6340 2903.08,6378.08 2996.08,6378.08 T2A_5.1@3055,6437 3061.5,6443.5 3587.99,6443.5 3594.49,6450 ; T4_5.1@3055,2138 3061,2144 3588.49,2144 3594.49,2150 ; T2B_5.1@3055,5138 3061,5144 3588.49,5144 3594.49,5150 ; +5V.1@595,9035 717.17,9035 R4.2@720,9032.17 732.8,9032.17 784.75,8980.21 942.5,8980.21 967.29,9005
  Signal_2 w20: v1(1065,9265) 1623.65,9265 1648.65,9290 1650,9290 1730,9370 v1(1740,9370) ; v1(2284.47,9240.53) 2424.47,9240.53 2425,9240 v1(2440,9240) ; v1(2325,3435) 2375,3385 2957.07,3385 2970.07,3398 2971.57,3398 3011.57,3438 T3_5.1@3055,3438 ; v1(2370,5130) v1(2450,5130) ; v1(2560,745) 2559.99,740.01 2630,670 v1(2630,630) 2630,510 2795.01,344.99 v1(2800,345) ; v1(2615,9240) v1(2685,9240) ; v1(2710,1110) v1(2710,1215) ; v1(2720,7795) 2997,7795 T1B_5.1@3055,7737 ; v1(2775,2220) 2775,2218.51 2778.51,2215 v1(2865,2215) 2978,2215 T4_5.1@3055,2138 ; v1(2805,9225) 2934.08,9095.92 2996.08,9095.92 T1A_5.1@3055,9037 ; v1(2850,6690) 2850,6570 2924.08,6495.92 2996.08,6495.92 T2A_5.1@3055,6437 ; v1(2865,5410) v1(2865,5135) 2920,5080 2997,5080 T2B_5.1@3055,5138
+28V: "DRIVER 1A.1" "DRIVER 1B.1" "DRIVER 2A.1" "DRIVER 2B.1" "DRIVER 3.1" "DRIVER 4.1" "DRIVER 5.1" +28V.1 J15.A1 R5.2 T1A_28.1 T1B_28.1 T2A_28.1 T2B_28.1 T3_28.1 T4_28.1 T5_28.1 | length 15961.8
  Top Layer w20: J15.A1@420.04,9311.18 421.95,9313.09 593.09,9313.09 +28V.1@595,9315 ; R5.2@1160,9092.17 v1(1160,9170) ; T5_28.1@3055,713 3507.49,713 3594.49,800 ; T4_28.1@3055,2013 3507.49,2013 3594.49,2100 ; T3_28.1@3055,3313 3507.49,3313 3594.49,3400 ; T2B_28.1@3055,5013 3507.49,5013 3594.49,5100 ; T2A_28.1@3055,6312 3506.49,6312 3594.49,6400 ; T1B_28.1@3055,7612 3506.49,7612 3594.49,7700 ; T1A_28.1@3055,8912 T1A_28.1@3057,8910 ; 3594.49,9000 3504.49,8910 T1A_28.1@3057,8910 ; v1(3600,8810) 3157,8810 T1A_28.1@3057,8910
  Signal_2 w20: +28V.1@595,9315 807.03,9315 952.03,9170 2677.43,9170 2897.43,8950 2936.43,8950 2938.43,8952 3015,8952 T1A_28.1@3055,8912 ; 3594.49,800 3586.54,807.95 3577.07,807.95 3520,865.02 3520,2025.51 3594.49,2100 3586.54,2107.95 3577.07,2107.95 3510,2175.02 3510,3315.51 3594.49,3400 3586.54,3407.95 3577.07,3407.95 3503.15,3481.87 3503.15,5008.66 3594.49,5100 3586.54,5107.95 3577.07,5107.95 3510,5175.02 3510,6315.51 3594.49,6400 3586.54,6407.95 3577.07,6407.95 3510,6475.02 3510,7615.51 3594.49,7700 3586.54,7707.95 3577.07,7707.95 3510,7775.02 3510,8720 v1(3600,8810)
"+28V Ret": "DRIVER 1A.6" "DRIVER 1B.6" "DRIVER 2A.6" "DRIVER 2B.6" "DRIVER 3.6" "DRIVER 4.6" "DRIVER 5.6" J15.A2 R9.1 | length 12563.6
  Top Layer w20: R9.1@1250,9092.17 1262.8,9092.17 1299.67,9129.04 1334.04,9129.04 v1(1335,9130)
  Signal_2 w20: J15.A2@420.04,9173.39 886.61,9173.39 930,9130 v1(1335,9130) 2675,9130 2945,8860 3529.49,8860 3694.49,9025 3845,8874.49 3845,7866.05 3711.9,7732.95 3708.96,7732.95 3701.01,7725 3694.49,7725 3845,7574.49 3845,6566.05 3711.9,6432.95 3708.96,6432.95 3701.01,6425 3694.49,6425 3845,6274.49 3845,5266.05 3711.9,5132.95 3708.96,5132.95 3701.01,5125 3694.49,5125 3533.15,4963.66 3533.15,3720.8 3636.54,3617.42 3636.54,3473.49 3680.41,3429.61 3689.88,3429.61 3694.49,3425 3845,3274.49 3845,2266.05 3711.9,2132.95 3708.96,2132.95 3701.01,2125 3694.49,2125 3845,1974.49 3845,966.05 3711.9,832.95 3708.96,832.95 3701.01,825 3694.49,825
Driver_EN: "U2 Diff Driver.4" "U5 Diff Driver.4" R8.1 U7.6 | length 10266.4
  Top Layer w6: R8.1@1050.08,9590 1454.57,9590 1529.57,9515 U7.6@1543.35,9515 1557.13,9515 2575,8497.13 v1(2575,7505) 2575,7228.35 ; v1(2260,6745) 2218.01,6703.01 2218.01,5856.99 2890.5,5184.5 2890.5,4827 2940,4777.5 2940,3765 2575,3400 2575,1663.35 ; v1(2375,6750) 2609.86,6750 2614.86,6755 v1(2620,6755) ; v1(2715,6825) 2830,6940 v1(2830,7505)
  Signal_2 w6: v1(2260,6745) 2262.5,6747.5 2372.5,6747.5 v1(2375,6750) ; v1(2575,7505) v1(2830,7505) ; v1(2620,6755) 2621.64,6756.64 2646.64,6756.64 v1(2715,6825)